# EAGLE board M-Toggle (EAGLE 7.6.0)
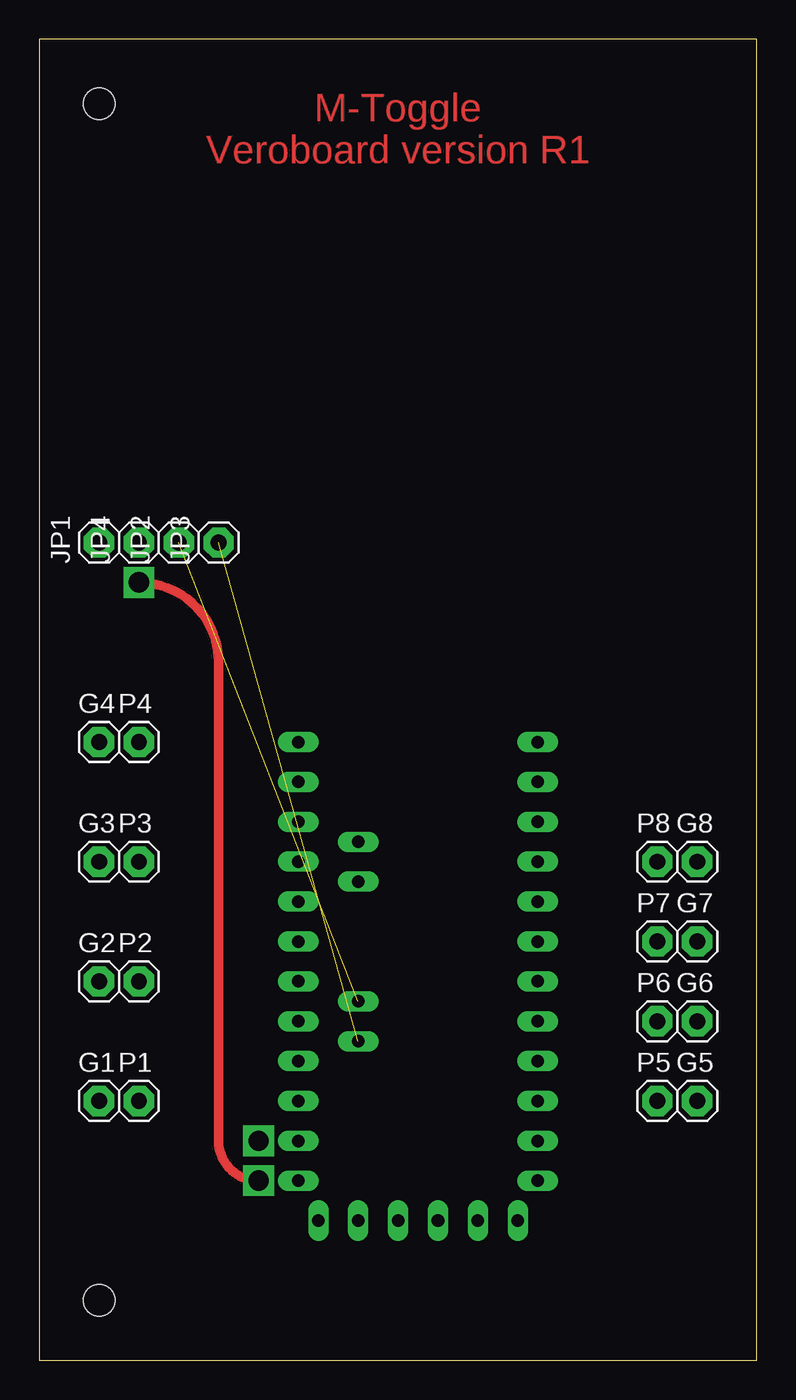
[diagram p0: board, top side]
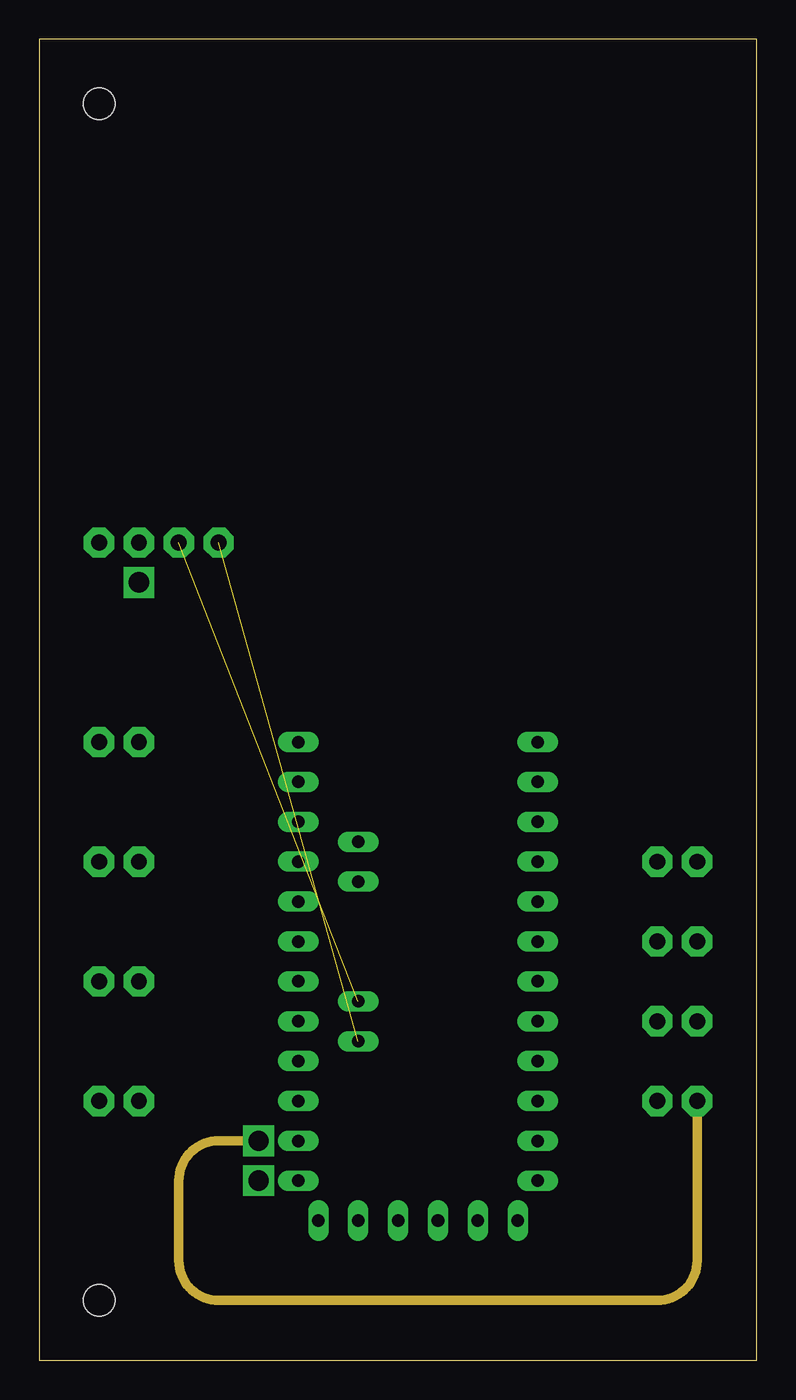
[diagram p1: board, inner layer GroundWire]
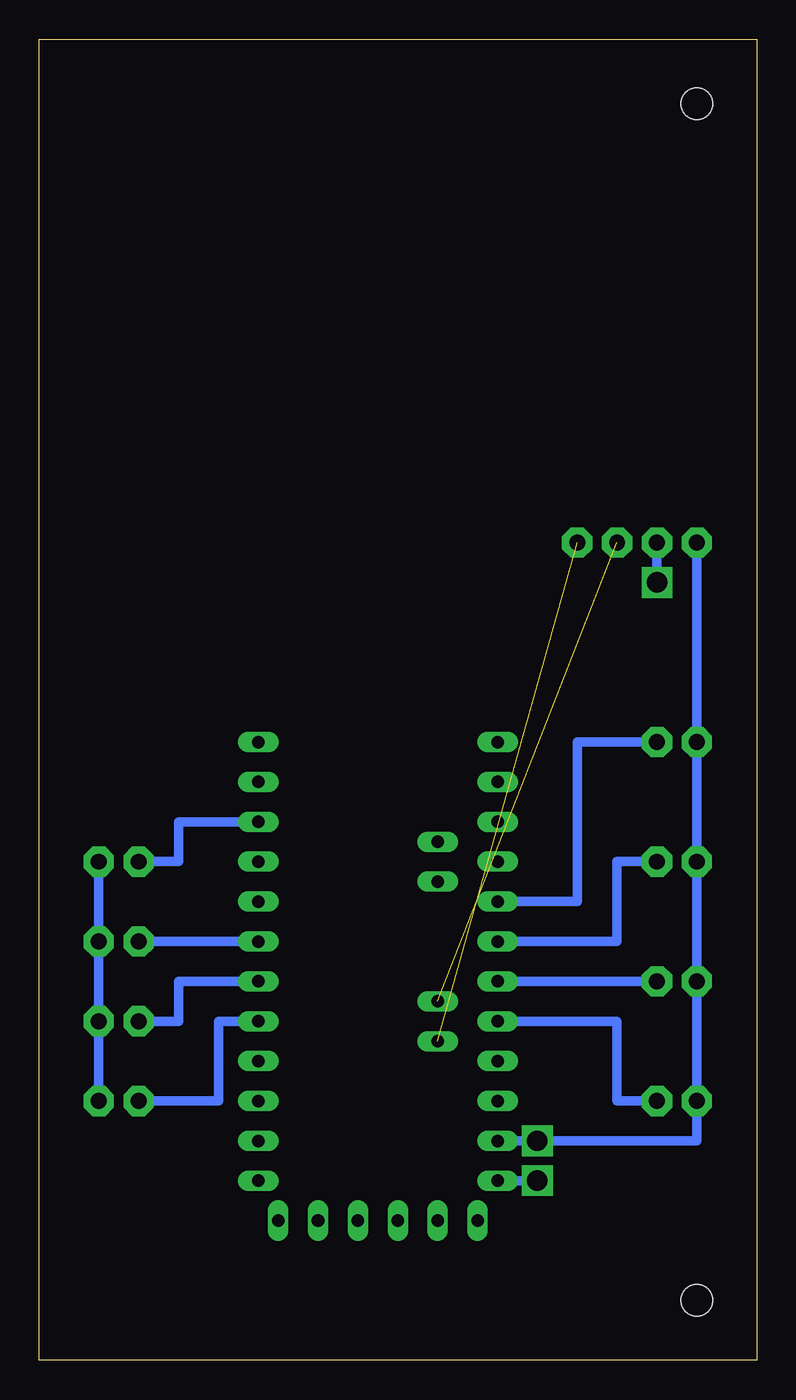
[diagram p2: board, bottom side, seen from below]

Size 45.7 x 84.12 mm. Coordinates in mm from the lower left corner, seen from the top.
Outline: 0,0 45.7,0 45.7,84.12 0,84.12 0,0
Copper layers (1*2*16): Top 0.035mm / dielectric 1.5mm / GroundWire 0.035mm / dielectric 0.15mm / Bottom 0.035mm
Design rules "default *": minimum track width 10mil, minimum drill 24mil, track to track 8mil, track to pad 8mil, pad to pad 8mil, via to via 8mil, smd to smd 8mil, copper to edge 40mil, drill to drill 8mil, minimum pad ring 10mil, minimum via ring 8mil, stop-mask expansion 4mil, vias tented up to drill 0mil, thermal gap 10mil
Holes 2 mm at 3.81,3.81 3.81,80.01

## Footprints (pad centres in the part's own frame; a part is rotated, then mirrored left to right if it is on the bottom)
1X01 = drill 1.016 pad 1.93 octagon: 1 0,0
PRO-MINI-2 = drill 0.8 long: A0 6.35,2.54; A1 6.35,0; A2 6.35,-2.54; A3 6.35,-5.08; A4 2.54,1.27; A5 2.54,3.81; A6 2.54,-8.89; A7 2.54,-6.35; D2 -8.89,2.54; D3 -8.89,0; D4 -8.89,-2.54; D5 -8.89,-5.08; D6 -8.89,-7.62; D7 -8.89,-10.16; D8 -8.89,-12.7; D9 -8.89,-15.24; D10 6.35,-15.24; D11 6.35,-12.7; D12 6.35,-10.16; D13 6.35,-7.62; DTR 5.08,15.24; GND 6.35,10.16; GND1 -8.89,5.08; GND2 -7.62,15.24; GND3 -5.08,15.24; RAW 6.35,12.7; RST 6.35,7.62; RST1 -8.89,7.62; RX1 -8.89,10.16; RX1-1 0,15.24; TX0 -8.89,12.7; TX0-1 2.54,15.24; VCC 6.35,5.08; VCC1 -2.54,15.24

## Placement (x,y rotation side)
G1  [1X01]  3.81,16.51 0 top
G2  [1X01]  3.81,24.13 0 top
G3  [1X01]  3.81,31.75 0 top
G4  [1X01]  3.81,39.37 0 top
G5  [1X01]  41.91,16.51 0 top
G6  [1X01]  41.91,21.59 0 top
G7  [1X01]  41.91,26.67 0 top
G8  [1X01]  41.91,31.75 0 top
JP1  [1X01]  3.81,52.07 90 top
JP2  [1X01]  8.89,52.07 90 top
JP3  [1X01]  11.43,52.07 90 top
JP4  [1X01]  6.35,52.07 90 top
P1  [1X01]  6.35,16.51 0 top
P2  [1X01]  6.35,24.13 0 top
P3  [1X01]  6.35,31.75 0 top
P4  [1X01]  6.35,39.37 0 top
P5  [1X01]  39.37,16.51 0 top
P6  [1X01]  39.37,21.59 0 top
P7  [1X01]  39.37,26.67 0 top
P8  [1X01]  39.37,31.75 0 top
U$1  PRO-MINI-2  [PRO-MINI-2]  22.86,24.13 180 top

## Library data of the parts
G1-G8 JP1-JP4 P1-P8 = adafruit
U$1 = Arduino-clone

## Nets
+5V: U$1.RST
+12V: JP4.1 U$1.RAW
AN0: P1.1 U$1.A0
AN1: P2.1 U$1.A1
AN2: P3.1 U$1.A2
AN3: P4.1 U$1.A3
DP0: P5.1 U$1.D2
DP1: P6.1 U$1.D3
DP2: P7.1 U$1.D4
DP3: P8.1 U$1.D7
DP4: U$1.D8
DP5: U$1.D11
DP6: U$1.D12
DP7: U$1.D13
GND: G1.1 G2.1 G3.1 G4.1 G5.1 G6.1 G7.1 G8.1 JP1.1 U$1.GND
SCL: JP3.1 U$1.A5
SDA: JP2.1 U$1.A4

## Tracks (layer width: path | path; a pad name or v marks a point on that pad's centre or on a via)
+12V  (via drill 1.3)
  Top 0.61: v6.35,49.53 arc-90 11.43,44.45 11.43,13.97 arc90 v13.97,11.43
  Bottom 0.61: v13.97,11.43 U$1.RAW | v6.35,49.53 JP4.1
AN0
  Bottom 0.61: P1.1 8.89,16.51 8.89,21.59 U$1.A0
AN1
  Bottom 0.61: P2.1 U$1.A1
AN2
  Bottom 0.61: P3.1 8.89,31.75 8.89,26.67 U$1.A2
AN3
  Bottom 0.61: P4.1 11.43,39.37 11.43,29.21 U$1.A3
DP0
  Bottom 0.61: P5.1 34.29,16.51 34.29,21.59 U$1.D2
DP1
  Bottom 0.61: P6.1 36.83,21.59 36.83,24.13 U$1.D3
DP2
  Bottom 0.61: P7.1 U$1.D4
DP3
  Bottom 0.61: P8.1 36.83,31.75 36.83,34.29 U$1.D7
GND  (via drill 1.3)
  GroundWire 0.61: G5.1 41.91,6.35 arc-90 39.37,3.81 11.43,3.81 arc-90 8.89,6.35 8.89,11.43 arc-90 11.43,13.97 v13.97,13.97
  Bottom 0.61: JP1.1 G4.1 G3.1 G2.1 G1.1 3.81,13.97 v13.97,13.97 U$1.GND | G5.1 G6.1 G7.1 G8.1
SCL  (1 unrouted)
SDA  (1 unrouted)

## Text on the board
Top: M-Toggle / Veroboard version R1